# EAGLE board layout3 (EAGLE 9.1.3)
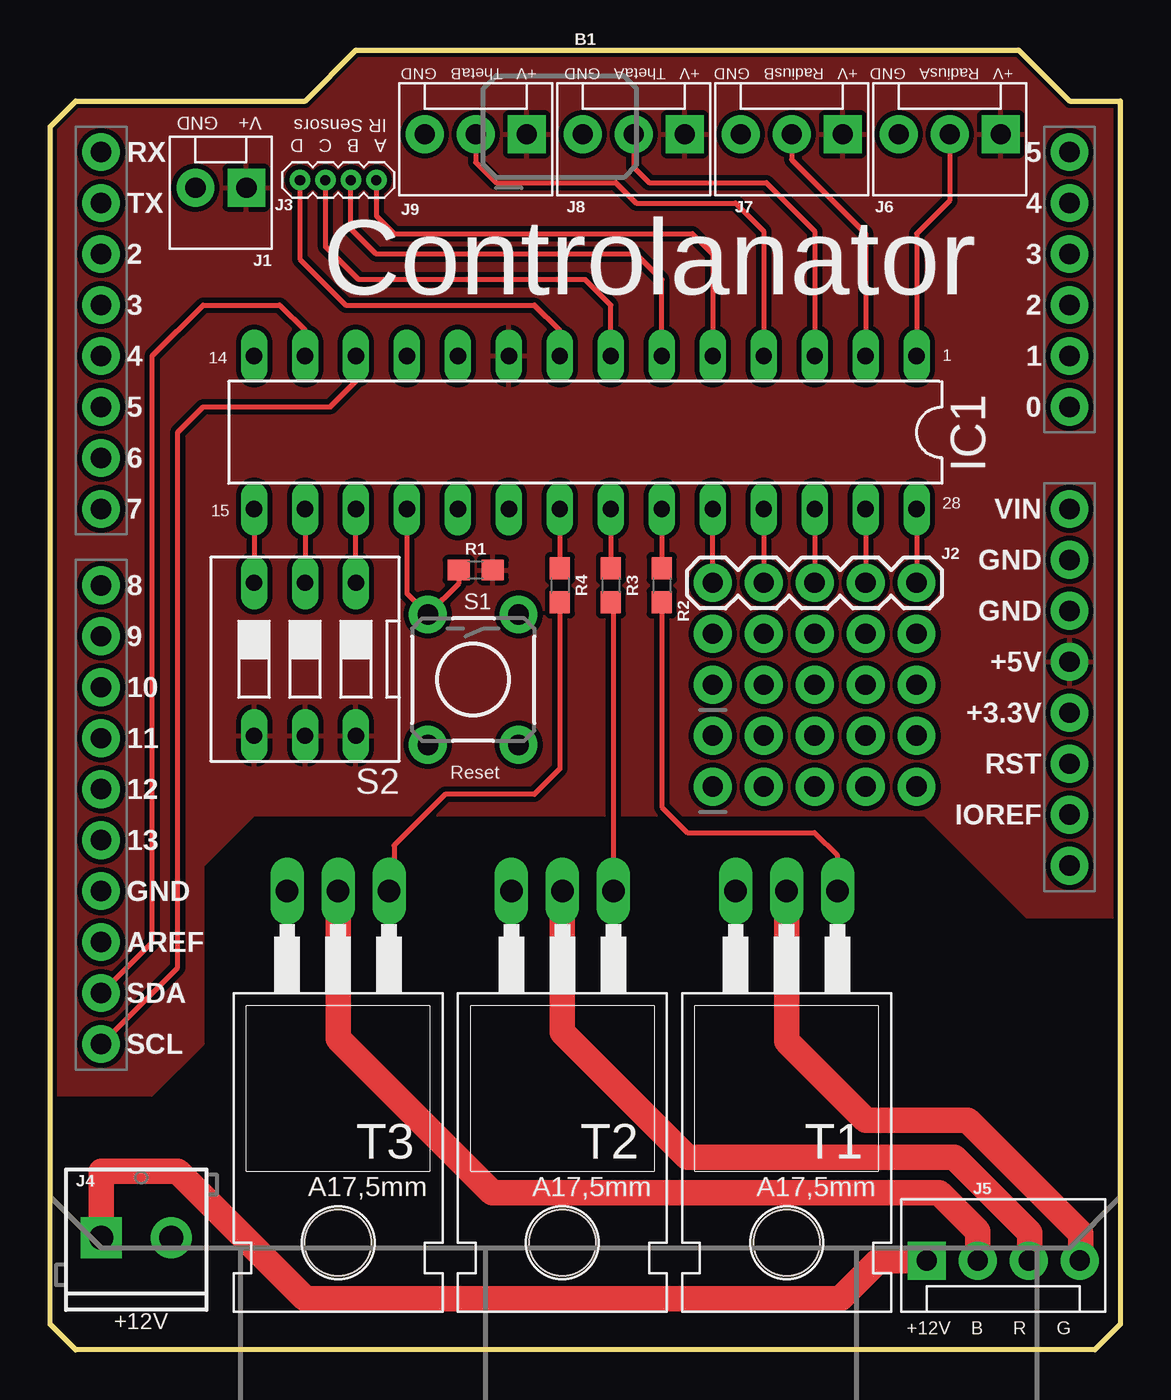
[diagram p0: board, top side]
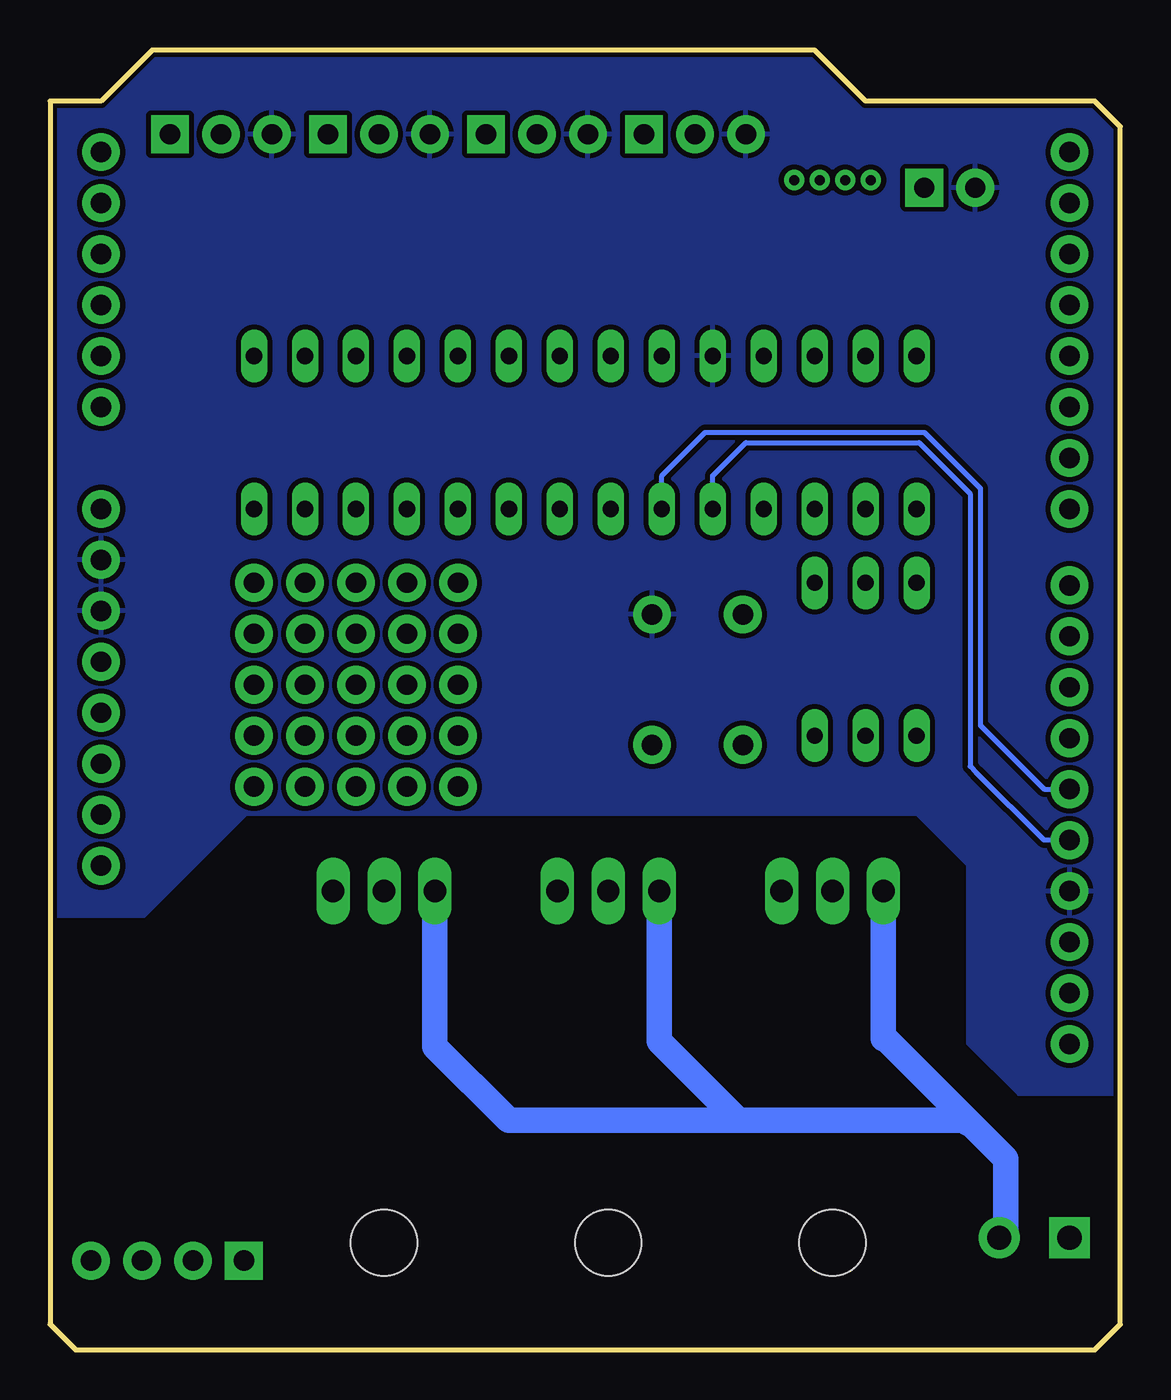
[diagram p1: board, bottom side, seen from below]

Size 53.34 x 64.77 mm. Coordinates in mm from the lower left corner, seen from the top.
Outline: 0,60.96 1.27,62.23 12.7,62.23 15.24,64.77 48.26,64.77 50.8,62.23 53.34,62.23 53.34,1.27 52.07,0 1.27,0 0,1.27 0,60.96
Copper layers (1*16): Top 0.035mm / dielectric 1.5mm / Bottom 0.035mm
Design rules "layout3": minimum track width 10mil, minimum drill 20mil, track to track 10mil, track to pad 0.205mm, pad to pad 0.205mm, via to via 10mil, smd to smd 8mil, copper to edge 8mil, drill to drill 8mil, minimum pad ring 10mil, minimum via ring 10mil, stop-mask expansion 4mil, vias tented up to drill 25mil, thermal gap 10mil
Net classes: 1 logic: width 0.254 mm, drill 0.254 mm; 2 power: width 1.27 mm, drill 1.27 mm, clearance 0.508 mm

## Footprints (pad centres in the part's own frame; a part is rotated, then mirrored left to right if it is on the bottom)
UNO_R3_SHIELD = drill 1.016 pad 1.88: 3.3V 24.13,-2.54; 5V 24.13,0; A0 24.13,12.7; A1 24.13,15.24; A2 24.13,17.78; A3 24.13,20.32; A4 24.13,22.86; A5 24.13,25.4; AREF -24.13,-13.97; D2 -24.13,20.32; D3 -24.13,17.78; D4 -24.13,15.24; D5 -24.13,12.7; D6 -24.13,10.16; D7 -24.13,7.62; D8 -24.13,3.81; D9 -24.13,1.27; D10 -24.13,-1.27; D11 -24.13,-3.81; D12 -24.13,-6.35; D13 -24.13,-8.89; GND@0 24.13,2.54; GND@1 24.13,5.08; GND@2 -24.13,-11.43; IOREF 24.13,-7.62; NC 24.13,-10.16; RES 24.13,-5.08; RX -24.13,25.4; SCL -24.13,-19.05; SDA -24.13,-16.51; TX -24.13,22.86; VIN 24.13,7.62
DIL28-3 = drill 0.813 long: 1 -16.51,-3.81; 2 -13.97,-3.81; 3 -11.43,-3.81; 4 -8.89,-3.81; 5 -6.35,-3.81; 6 -3.81,-3.81; 7 -1.27,-3.81; 8 1.27,-3.81; 9 3.81,-3.81; 10 6.35,-3.81; 11 8.89,-3.81; 12 11.43,-3.81; 13 13.97,-3.81; 14 16.51,-3.81; 15 16.51,3.81; 16 13.97,3.81; 17 11.43,3.81; 18 8.89,3.81; 19 6.35,3.81; 20 3.81,3.81; 21 1.27,3.81; 22 -1.27,3.81; 23 -3.81,3.81; 24 -6.35,3.81; 25 -8.89,3.81; 26 -11.43,3.81; 27 -13.97,3.81; 28 -16.51,3.81
MOLEX-1X2 = drill 1.016 pad 1.88 square: 1 0,0 | drill 1.016 pad 1.88: 2 2.54,0
1X05 = drill 1.016 pad 1.88: 1 0,0; 2 2.54,0; 3 5.08,0; 4 7.62,0; 5 10.16,0
1X04_1.27MM = drill 0.508 pad 1: 1 0,0; 2 1.27,0; 3 2.54,0; 4 3.81,0
SCREWTERMINAL-3.5MM-2 = drill 1.2 pad 2.032 square: 1 0,0 | drill 1.2 pad 2.032: 2 3.5,0
MOLEX-1X4 = drill 1.016 pad 1.88 square: 1 0,0 | drill 1.016 pad 1.88: 2 2.54,0; 3 5.08,0; 4 7.62,0
MOLEX-1X3 = drill 1.016 pad 1.88 square: 1 0,0 | drill 1.016 pad 1.88: 2 2.54,0; 3 5.08,0
2X5_NOSILK = drill 1.016 pad 1.88: 1 0,0; 2 0,2.54; 3 2.54,0; 4 2.54,2.54; 5 5.08,0; 6 5.08,2.54; 7 7.62,0; 8 7.62,2.54; 9 10.16,0; 10 10.16,2.54
0603 = smd 1.1 x 1: 1 -0.85,0; 2 0.85,0
TACTILE_SWITCH_PTH_6.0MM = drill 1.016 pad 1.88: 1 -3.251,2.261; 2 3.251,2.261; 3 -3.251,-2.261; 4 3.251,-2.261
DS-03 = drill 0.813 long: 1 -2.54,-3.81; 2 0,-3.81; 3 2.54,-3.81; 4 2.54,3.81; 5 0,3.81; 6 -2.54,3.81
TO220 = drill 1.118 long: 1 -2.54,-6.35; 2 0,-6.35; 3 2.54,-6.35 | hole 3.302: 0,11.176

## Placement (x,y rotation side)
B1  ARDUINO_UNO_R3_SHIELDBASIC  [UNO_R3_SHIELD]  26.67,34.29 0 top
IC1  MCP23017SP  [DIL28-3]  26.67,45.72 180 top
J1  [MOLEX-1X2]  9.78,57.91 180 top
J2  [1X05]  43.18,38.23 180 top
J3  [1X04_1.27MM]  12.45,58.29 0 top
J4  [SCREWTERMINAL-3.5MM-2]  2.54,5.59 0 top
J5  LED  [MOLEX-1X4]  43.69,4.45 0 top
J6  Radius A  [MOLEX-1X3]  47.37,60.58 180 top
J7  Radius B  [MOLEX-1X3]  39.5,60.58 180 top
J8  Theta A  [MOLEX-1X3]  31.62,60.58 180 top
J9  Theta B  [MOLEX-1X3]  23.75,60.58 180 top
J10  [2X5_NOSILK]  33.02,33.15 0 top
J11  [2X5_NOSILK]  33.02,28.07 0 top
R1  10k  [0603]  21.21,38.86 0 top
R2  100  [0603]  30.48,38.1 270 top
R3  100  [0603]  27.94,38.1 270 top
R4  100  [0603]  25.4,38.1 270 top
S1  Reset  [TACTILE_SWITCH_PTH_6.0MM]  21.08,33.4 270 top
S2  [DS-03]  12.7,34.42 180 top
T1  200mA/40V  [TO220]  36.7,16.51 180 top
T2  200mA/40V  [TO220]  25.53,16.51 180 top
T3  200mA/40V  [TO220]  14.35,16.51 180 top

## Library data of the parts
B1 = SparkFun-Boards
IC1 = adafruit
J1 = SparkFun-Connectors; SF_ID: PRT-09918
J2 J3 J10 J11 = SparkFun-Connectors
J4 = SparkFun-Connectors; PROD_ID: CONN-08399
J5 = SparkFun-Connectors; PROD_ID: CONN-08186; SF_ID: PRT-08231
J6-J9 = SparkFun-Connectors; PROD_ID: CONN-08625; SF_ID: PRT-08096
R1 = SparkFun-Resistors; PROD_ID: RES-00824
R2-R4 = SparkFun-Resistors; PROD_ID: RES-12438
S1 = SparkFun-Switches; PROD_ID: SWCH-08441; SF_SKU: COM-00097
S2 = switch-dil; OC_FARNELL: 1255223; OC_NEWARK: unknown
T1-T3 = transistor-neu-to92

## Nets
12V [power]: J4.1 J5.1
A0 [logic]: IC1.15 S2.3
A1 [logic]: IC1.16 S2.2
A2 [logic]: IC1.17 S2.1
BLUE: IC1.21 R4.1
GND [logic]: B1.GND@0 B1.GND@1 B1.GND@2 IC1.10 J1.2 J6.3 J7.3 J8.3 J9.3 S1.1
GREEN [logic]: IC1.23 R2.1
INT_A [logic]: B1.D12 IC1.20
INT_B [logic]: B1.D13 IC1.19
IR_A [logic]: IC1.5 J3.4
IR_B [logic]: IC1.6 J3.3
IR_C [logic]: IC1.7 J3.2
IR_D [logic]: IC1.8 J3.1
N$2: R2.2 T1.1
N$3 [power]: J5.4 T1.2
N$4: R3.2 T2.1
N$5 [power]: J5.3 T2.2
N$6: R4.2 T3.1
N$7 [power]: J5.2 T3.2
N$8 [power]: J4.2 T1.3 T2.3 T3.3
N$9: IC1.28 J2.1
N$10: IC1.27 J2.2
N$11: IC1.26 J2.3
N$12: IC1.25 J2.4
N$13: IC1.24 J2.5
RADIUS_A [logic]: IC1.1 J6.2
RADIUS_B [logic]: IC1.2 J7.2
RED: IC1.22 R3.1
RESET [logic]: IC1.18 R1.1 S1.3
SDA [logic]: B1.SDA IC1.13
SDL [logic]: B1.SCL IC1.12
THETA_A [logic]: IC1.3 J8.2
THETA_B [logic]: IC1.4 J9.2
VCC: B1.5V IC1.9 J1.1 J6.1 J7.1 J8.1 J9.1 R1.2 S2.4 S2.5 S2.6

## Tracks (layer width: path | path; a pad name or v marks a point on that pad's centre or on a via)
12V
  Top 1.27: J4.1 2.54,8.89 6.35,8.89 12.7,2.54 39.37,2.54 41.27,4.45 J5.1
A0
  Top 0.254: IC1.15 S2.3
A1
  Top 0.254: IC1.16 S2.2
A2
  Top 0.254: S2.1 IC1.17
BLUE
  Top 0.254: IC1.21 R4.1
GND
  pour Bottom (rank 3): 0,12.7 5.08,12.7 7.62,15.24 7.62,24.13 10.16,26.67 43.56,26.67 48.64,21.59 53.34,21.59 53.34,62.23 50.8,62.23 48.26,64.77 15.24,64.77 12.7,62.23 1.27,62.23 0,60.96
GREEN
  Top 0.254: IC1.23 R2.1
INT_A
  Bottom 0.254: B1.D12 3.81,27.94 6.99,31.12 6.99,42.93 9.78,45.72 20.7,45.72 22.86,43.56 IC1.20
INT_B
  Bottom 0.254: B1.D13 3.81,25.4 7.18,28.77 7.49,29.08 7.49,42.67 10.03,45.21 18.67,45.21 20.32,43.56 IC1.19
IR_A
  Top 0.254: IC1.5 33.02,54.61 32,55.63 17.14,55.63 16.26,56.52 J3.4
IR_B
  Top 0.254: IC1.6 30.48,53.34 29.21,54.61 16.26,54.61 14.99,55.88 J3.3
IR_C
  Top 0.254: J3.2 13.72,55.63 13.72,54.99 15.37,53.34 26.67,53.34 27.94,52.07 IC1.7
IR_D
  Top 0.254: IC1.8 25.4,50.8 24.13,52.07 14.73,52.07 12.45,54.36 J3.1
N$2
  Top 0.254: T1.1 39.24,24.64 38.1,25.78 31.75,25.78 30.48,27.05 R2.2
N$3
  Top 1.27: J5.4 51.36,4.5 51.36,5.31 51.36,5.81 45.74,11.43 40.64,11.43 36.7,15.37 T1.2
N$4
  Top 0.254: R3.2 28.07,37.12 T2.1
N$5
  Top 1.27: J5.3 48.82,4.5 48.82,5.83 45.05,9.6 31.75,9.6 25.53,15.82 T2.2
N$6
  Top 0.254: R4.2 25.4,28.96 24.13,27.69 19.68,27.69 17.14,25.15 17.14,23.11 T3.1
N$7
  Top 1.27: T3.2 14.35,15.49 22.02,7.82 44.31,7.82 46.23,5.91 J5.2
N$8
  Bottom 1.27: 11.81,15.49 11.81,16.26 | 11.81,16.26 T3.3 | 19.68,11.43 19.05,11.43 22.99,15.37 T2.3 | 19.68,11.43 30.48,11.43 34.16,15.11 T1.3 | 5.71,9.53 7.49,11.3 7.62,11.3 7.75,11.43 19.68,11.43 | J4.2 5.71,5.91 5.71,9.53 | 5.71,9.53 11.81,15.62 11.81,16.26
N$9
  Top 0.254: IC1.28 J2.1
N$10
  Top 0.254: IC1.27 J2.2
N$11
  Top 0.254: IC1.26 J2.3
N$12
  Top 0.254: IC1.25 J2.4
N$13
  Top 0.254: J2.5 IC1.24
RADIUS_A
  Top 0.254: IC1.1 43.18,55.63 44.83,57.28 J6.2
RADIUS_B
  Top 0.254: IC1.2 40.64,55.63 36.96,59.31 J7.2
RED
  Top 0.254: IC1.22 R3.1
RESET
  Top 0.254: IC1.18 17.78,37.69 S1.3 20.36,38.19 R1.1
SDA
  Top 0.254: IC1.13 12.7,50.8 11.43,52.07 7.62,52.07 5.08,49.53 5.08,20.32 B1.SDA
SDL
  Top 0.254: IC1.12 15.24,48.26 13.97,46.99 7.62,46.99 6.35,45.72 6.35,19.05 B1.SCL
THETA_A
  Top 0.254: IC1.3 38.1,55.75 35.69,58.17 29.84,58.17 29.08,58.93 J8.2
THETA_B
  Top 0.254: IC1.4 35.56,55.75 34.16,57.15 29.21,57.15 28.19,58.17 22.22,58.17 21.21,59.18 J9.2
VCC
  pour Top (rank 3): 0,12.7 5.08,12.7 7.62,15.24 7.62,24.13 10.16,26.67 43.56,26.67 48.64,21.59 53.34,21.59 53.34,62.23 50.8,62.23 48.26,64.77 15.24,64.77 12.7,62.23 1.27,62.23 0,60.96

## Text on the board
tPlace: +V ThetaB GND | +V ThetaA GND | +V RadiusB GND | +V RadiusA GND | V+ GND | A B C D / IR Sensors | Controlanator | 14 | 1 | 15 | 28 | Reset | +12V | +12V B R G